# Altium PCB MainPCBV6.PcbDoc (part 2 of 5)
Units mm, origin at the board's own origin, x right, y up, seen from the top; angles counter-clockwise.
Board outline 176 x 144.01 mm, 2 copper layers (Top Layer, Bottom Layer); 232 components, 243 nets, 937 pads, 277 vias.
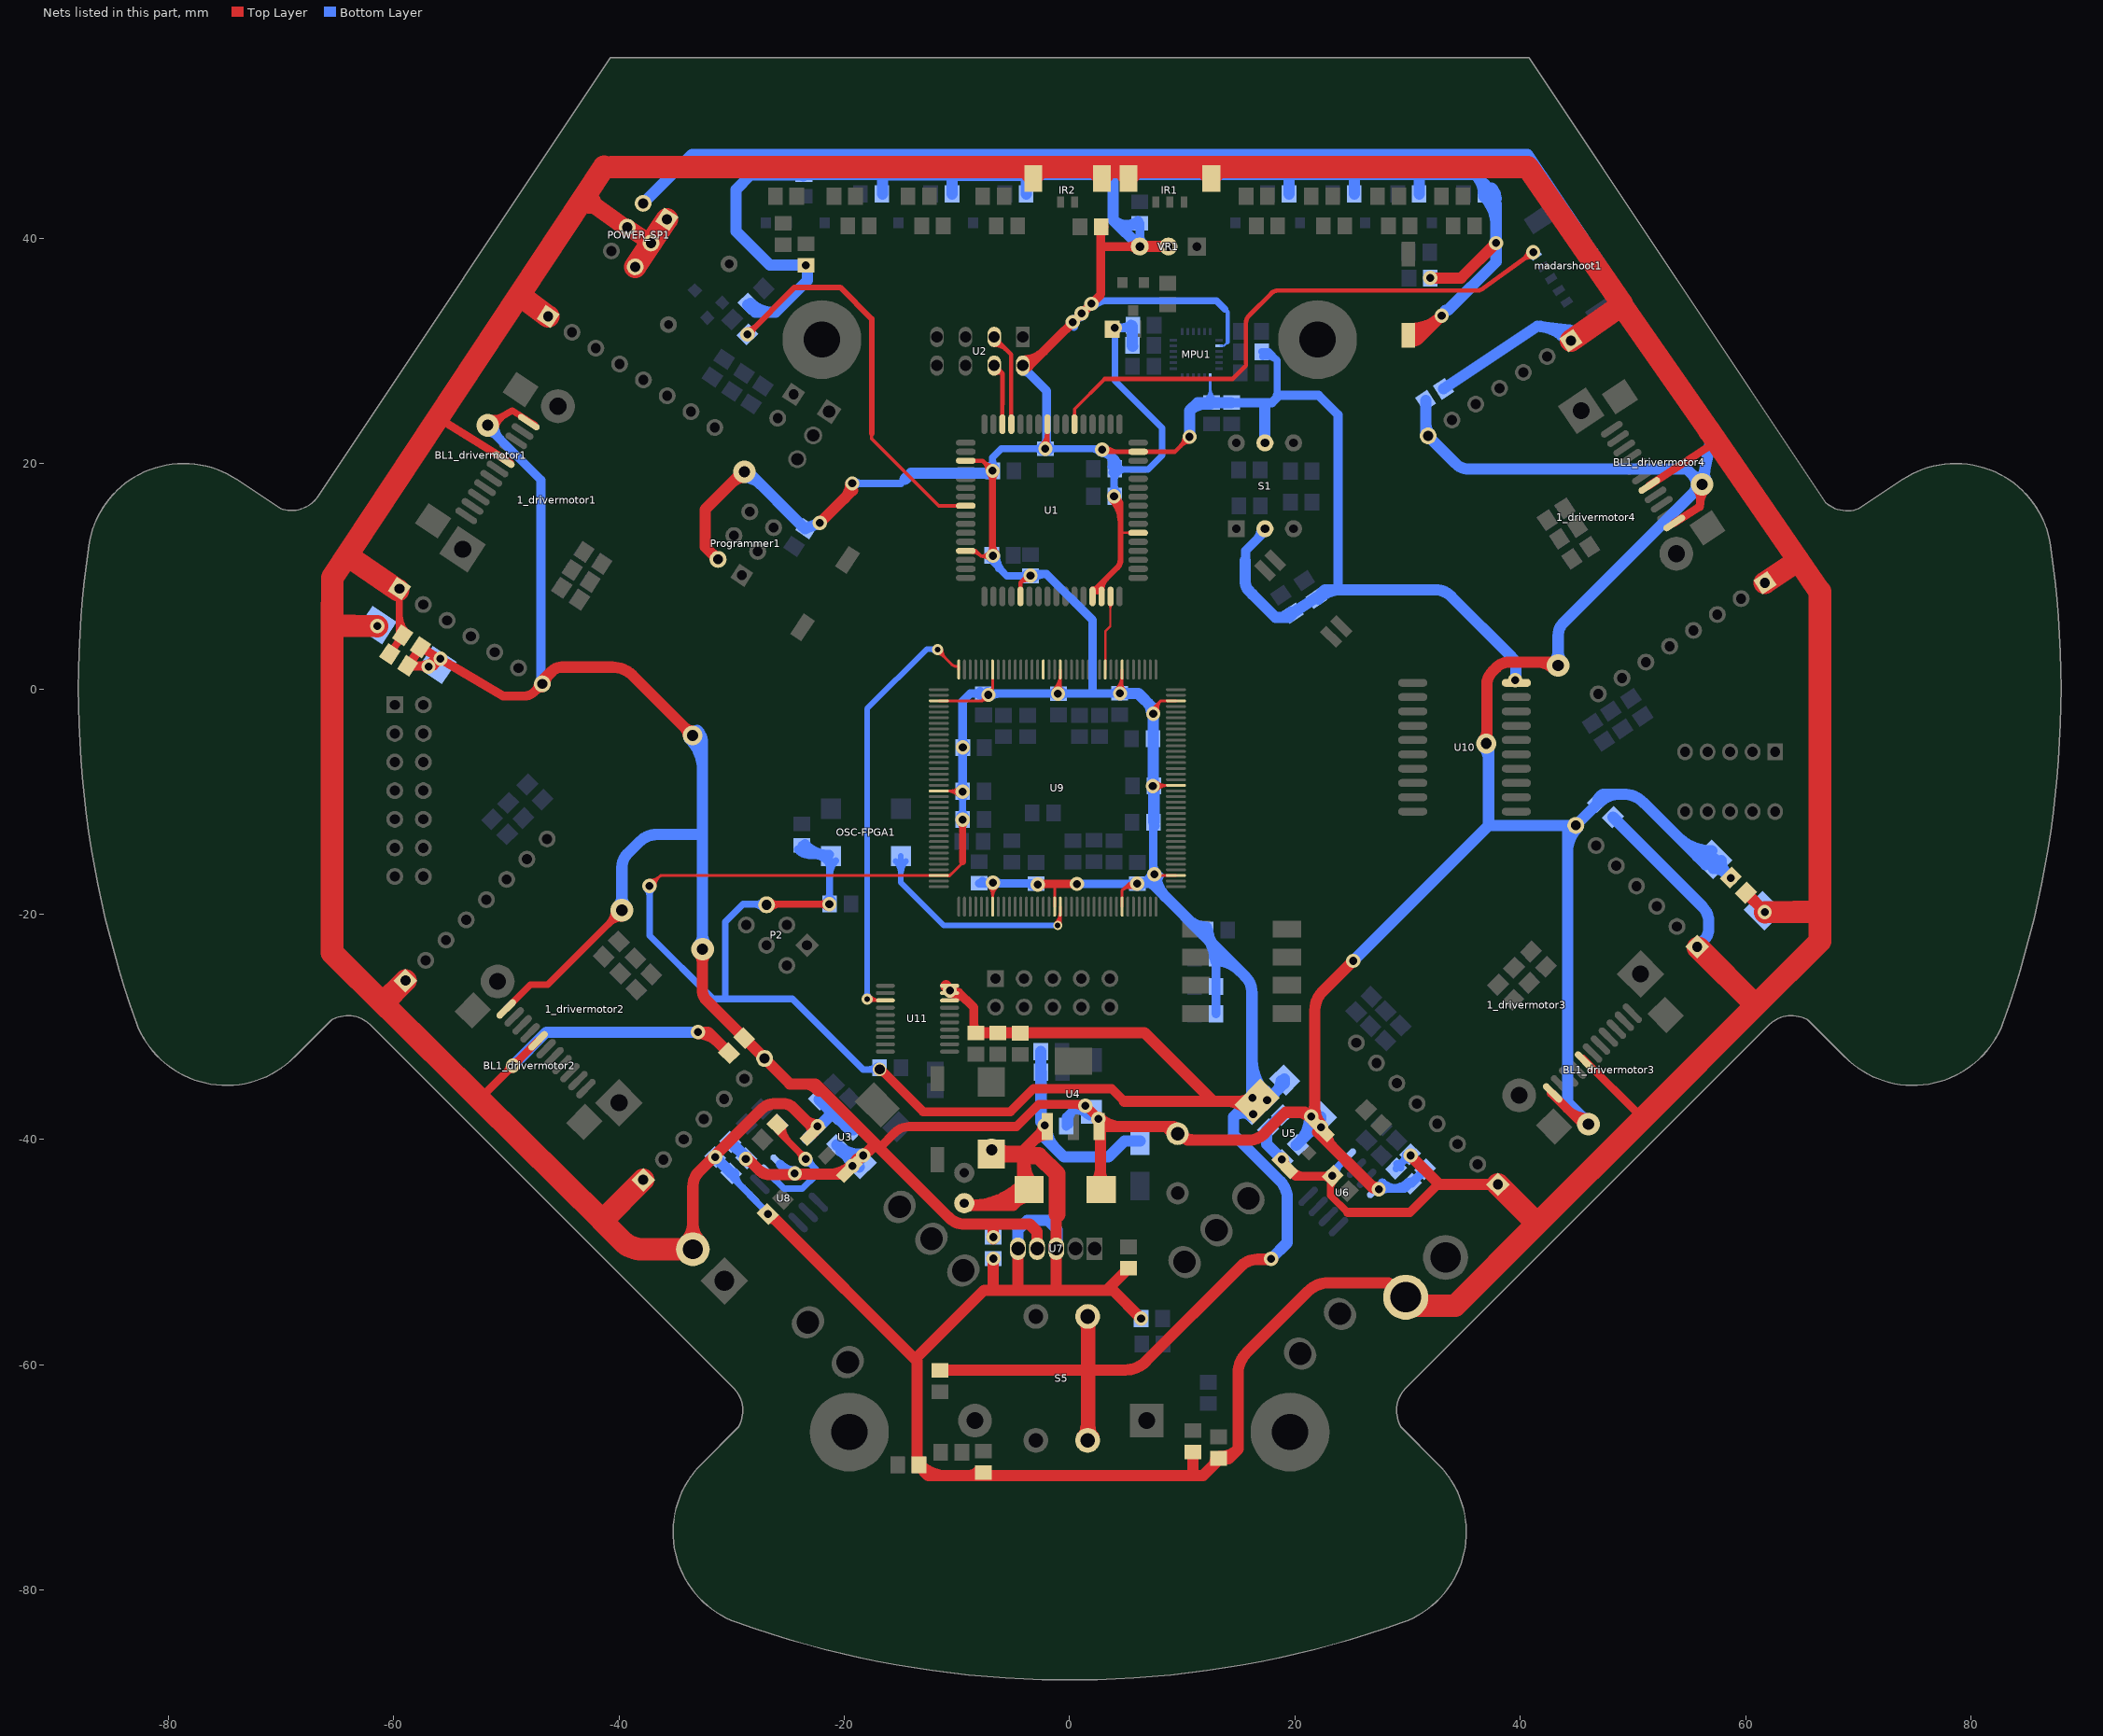
[diagram p2: the nets of this part, all layers, seen from the top]

## Via types
v1: diameter 1.27, hole 0.711, Top Layer to Bottom Layer, 228 vias
v2: diameter 1, hole 0.5, Top Layer to Bottom Layer, 16 vias
v3: diameter 2, hole 1, Top Layer to Bottom Layer, 11 vias
v4: diameter 0.8, hole 0.5, Top Layer to Bottom Layer, 5 vias
v5: diameter 1, hole 0.7, Top Layer to Bottom Layer, 5 vias
v6: diameter 1.2, hole 0.6, Top Layer to Bottom Layer, 3 vias
v7: diameter 1.778, hole 0.965, Top Layer to Bottom Layer, 2 vias
v8: diameter 1, hole 0.6, Top Layer to Bottom Layer, 2 vias
v9: diameter 0.9, hole 0.5, Top Layer to Bottom Layer, 1 vias
v10: diameter 0.7, hole 0.45, Top Layer to Bottom Layer, 1 vias
v11: diameter 1.2, hole 0.9, Top Layer to Bottom Layer, 1 vias
v12: diameter 0.8, hole 0.4, Top Layer to Bottom Layer, 1 vias
v13: diameter 1.1, hole 0.711, Top Layer to Bottom Layer, 1 vias

## Nets (pads, with @x,y where several pads share a name; then routed paths per layer and width w, separated by ;. In a path a pad name is that pad's centre, name@x,y a point inside that pad or via, vN(x,y) a via of type N, cw(c..) or ccw(c..) an arc to the next point about the centre after c; other vN are vias at no path point) (continued)
3.3V: C8.2 C9.2 C10.2 C11.2 C12.2 C13.2 C14.2 C23.2 C24.2 C34.2 C40.1 C43.2 C44.1 C50.2 C51.2 C52.2 C53.2 C54.2 C55.2 C56.2 C57.2 C58.2 C59.2 C60.2 C61.2 C67.2 C68.2 C69.2 D4.1 MPU1.8 MPU1.13 OSC-FPGA1.4 P2.5 Programmer1.2 R16.1 R17.1 R30.1 R31.1 R32.1 R34_LED1.2 R34_LED2.2 R34_LED3.2 R34_LED4.2 R34_LED5.2 R34_LED6.2 R34_LED7.2 R41.1 R42.1 R44.1 R45.2 R46.2 R47.2 R48.2 R49.2 R50.2 R51.2 R52.2 R53.2 R55.2 S1.2 S1.5 S2.2 S5.2 U1.6 U1.15 U1.25 U1.35 U1.45 U1.53 U1.61 U1.62 U2.2 U5.4 U9.3 U9.19 U9.34 U9.43 U9.54 U9.66 U9.75 U9.91 U9.106 U9.115 U9.126 U9.138 U10.20 U11.18 U11.19 U11.20 VR1.2 VR1.3 | length 936.4
  Top Layer w0.2: 4.512,13.767 4.594,13.85 U1.6@6.075,13.85 ; U1.6@5.351,13.726 ccw(c5.053,13.427) 5.053,13.85 ccw(c5.053,14.272) U1.6@5.351,13.973
  Top Layer w0.254: v1@-37.313,-17.247 ccw(c-37.313,-16.449) -36.749,-17.013 ; v1@-37.313,-16.993 ccw(c-37.313,-15.582) -36.315,-16.58 ; v1@-37.287,-17.551 -36.3,-16.564 U9.106@-11.617,-16.564 -10.62,-16.564 ; v1@-36.805,-17.501 cw(c-35.762,-17.501) -36.499,-16.763 ; U9.91@-11.617,-9.064 -9.59,-9.064 v1(-9.51,-9.144) ; U9.75@-11.617,-1.064 -7.769,-1.064 ; U9.91@-10.93,-9.064 cw(c-10.93,-10.564) v1@-9.869,-9.503 ; U9.106@-10.855,-16.565 ccw(c-10.738,-16.446) -10.62,-16.564 ; U9.106@-10.853,-16.566 ccw(c-10.853,-16.008) -10.459,-16.402 ; -10.543,-9.064 ccw(c-10.543,-8.111) v1@-9.869,-8.785 ; -10.317,-9.064 cw(c-10.317,-9.951) v1@-9.689,-9.324 ; -9.51,-15.357 -9.461,-15.405 -10.62,-16.564 ; v1@-7.691,-0.708 cw(c-8.009,-0.824) -7.769,-1.064 ; v1@-7.62,-0.381 -7.62,-0.914 -7.769,-1.064 ; v1@-7.419,-0.998 ccw(c-7.546,-1.287) -7.769,-1.064 ; v1(-7.214,-0.533) -7.29,-0.533 -7.366,-0.457 -7.417,-0.457 -7.442,-0.483 -7.584,-0.483 -7.475,-0.592 -6.842,0.041 ; v1@-7.166,-17.58 cw(c-7.949,-18.363) -6.842,-18.363 ; v1@-7.107,-0.037 ccw(c-7.046,0.245) -6.842,0.041 ; v1@-6.845,-0.184 cw(c-6.728,-0.073) -6.842,0.041 ; U9.115@-6.842,-19.339 v1@-6.842,-17.393 ; U9.115@-6.842,-18.532 cw(c-5.496,-18.532) v1@-6.448,-17.58 ; -6.842,-17.919 cw(c-6.109,-17.919) v1@-6.628,-17.401 ; U9.66@-6.842,1.711 -6.842,0.041 ; v1@-1.401,-0.062 ccw(c-2.758,1.295) U9.54@-0.838,1.295 ; U9.126@-1.342,-19.339 -1.342,-17.38 cw(c-1.27,-17.38) -1.314,-17.323 ; v1@-1.221,-0.242 ccw(c-2.145,0.682) -0.838,0.682 ; v1(-1.041,-0.422) -0.95,-0.422 -0.838,-0.533 -0.838,1.707 U9.54@-0.842,1.711 ; -0.838,0.314 ccw(c-0.306,0.314) v1@-0.682,-0.062 ; v1@4.111,-0.047 ccw(c2.792,1.272) U9.43@4.658,1.272 ; v1@4.291,-0.227 ccw(c3.405,0.659) 4.658,0.659 ; U9.138@4.658,-19.339 4.658,-17.882 4.674,-17.882 ; v1@4.658,-0.336 U9.43@4.658,1.711 ; 4.658,0.368 ccw(c5.244,0.368) v1@4.83,-0.047 ; 4.906,-17.649 cw(c5.465,-18.209) v1@5.866,-17.527 ; 5.138,-17.417 cw(c5.637,-17.916) 5.994,-17.308 5.984,-17.297 5.258,-17.297 ; v1@5.516,-17.479 ccw(c5.258,-17.572) 5.258,-17.297 ; v1@5.523,-17.118 cw(c5.258,-17.012) 5.258,-17.297 ; v1@5.737,-17.746 ccw(c5.293,-18.501) 4.674,-17.882 ; v1@7.391,-1.753 8.08,-1.064 ; v1@7.421,-8.564 U9.19@9.433,-8.564 ; v1@7.518,-16.564 U9.3@9.433,-16.564 ; v1@7.556,-8.816 cw(c8.164,-9.424) 8.164,-8.564 ; v1@7.652,-2.114 cw(c8.318,-1.843) 7.81,-1.334 ; v1@7.735,-8.995 cw(c8.777,-10.037) U9.19@8.777,-8.564 ; v1@7.735,-8.277 ccw(c8.428,-7.584) 8.428,-8.564 ; v1@7.887,-2.018 cw(c8.703,-1.686) 8.08,-1.064 ; U9.34@9.433,-1.064 8.08,-1.064 ; 4.674,-17.882 5.258,-17.297
  Top Layer w0.305: U1.45@-9.225,12.25 -9.206,12.268 -8.357,12.268 -7.874,11.786 ; U1.45@-8.625,12.127 cw(c-8.625,11.139) -7.926,11.838 ; v1@-7.182,12.115 cw(c-7.874,12.677) -7.874,11.786 ; v1@-7.157,11.478 ccw(c-7.874,10.795) -7.874,11.786 ; v1@-6.833,11.786 -7.874,11.786
  Top Layer w0.381: U1.35@-9.225,20.25 -7.738,20.25 v1(-6.843,19.355) ; v1@-7.287,19.355 ccw(c-8.36,19.355) -7.602,20.114 ccw(c-6.843,20.872) v1@-6.843,19.799 ; U1.53@-4.375,8.2 -4.375,9.443 ; v1@-3.61,9.633 ccw(c-3.834,8.902) -4.375,9.443 ; v1(-3.48,10.058) -3.48,10.084 -3.531,10.084 -3.632,10.185 -4.375,9.443 ; v1@-2.473,21.635 ccw(c-3.677,22.839) U1.25@-1.975,22.839 ; v1(-2.159,21.321) -1.975,21.505 U1.25@-1.975,23.5 ; -1.975,21.949 ccw(c-1.531,21.949) v1@-1.845,21.635 ; v1(2.87,21.234) 3.055,21.05 U1.15@6.075,21.05 9.34,21.05 v1@10.655,22.365 ; v1@3.185,20.92 cw(c3.497,20.607) 3.497,21.05 ; v1@3.185,21.549 ccw(c4.389,22.754) 4.389,21.05 ; 9.866,21.575 ccw(c9.064,22.377) v1@10.198,22.377 ; 9.927,21.637 cw(c10.643,20.921) v1@10.643,21.933
  Top Layer w0.508: U1.61@2.025,8.821 ccw(c2.025,9.467) 2.482,9.01 ; U1.61@2.027,8.82 ccw(c2.08,9.325) 2.438,8.966 ; 2.438,8.613 2.438,8.966 ; U1.62@2.846,8.8 cw(c4.233,8.8) 3.252,9.78 ; v1@3.668,16.825 cw(c1.63,14.787) 4.512,14.787 ; v1(3.937,17.094) 4.512,16.52 ; v1@3.972,16.715 cw(c4.034,16.042) 4.512,16.52 ; v1@4.027,17.184 cw(c2.856,16.014) 4.512,16.014 ; v1@4.316,17.059 ccw(c4.99,16.998) 4.512,16.52 ; 2.438,8.966 4.217,10.745 ccw(c3.507,11.455) 4.512,11.455 4.512,13.767 4.512,16.52
  Top Layer w0.6: P2.5@-26.822,-19.126 v1(-21.336,-19.126) ; P2.5@-26.589,-19.494 cw(c-25.703,-20.38) -25.703,-19.126 ; P2.5@-26.589,-18.857 ccw(c-25.94,-18.208) -25.94,-19.126 ; v1@-21.573,-19.363 ccw(c-22.145,-19.935) -22.145,-19.126 ccw(c-22.145,-18.317) v1@-21.573,-18.889
  Top Layer w0.635: v1@-9.734,-11.832 cw(c-10.276,-12.374) -9.51,-12.374 cw(c-8.743,-12.374) v1@-9.285,-11.832 ; -9.51,-15.357 v1@-9.51,-11.43 ; v1@-7.067,19.13 cw(c-7.609,18.588) -6.843,18.588 cw(c-6.076,18.588) v1@-6.618,19.13 ; v1@-7.032,12.036 ccw(c-7.488,12.492) -6.843,12.492 ; -6.843,12.663 ccw(c-5.955,12.663) v1@-6.583,12.036 ; v1(-6.843,19.355) -6.843,12.04 -7.071,11.811 v1(-6.807,11.811)
  Top Layer w0.75: v1@-2.987,-17.323 -1.314,-17.323 v1(0.635,-17.323) ; v1@-2.661,-17.557 cw(c-2.094,-18.124) -2.094,-17.323
  Top Layer w0.8: v11@-16.866,-33.982 cw(c-16.866,-34.71) -16.351,-34.195 ; v11@-16.815,-33.833 -16.713,-33.833 -13.005,-37.541 -5.258,-37.541 -3.218,-35.501 3.726,-35.501 4.835,-36.61 ; U11.19@-10.643,-27.032 cw(c-10.643,-29.132) -9.157,-27.647 ; v1@-10.456,-26.654 ccw(c-9.855,-26.191) U11.19@-9.855,-26.949 ; U11.19@-10.439,-26.949 U11.19@-9.855,-26.949 ; C68.2@-8.509,-30.556 -8.509,-28.296 U11.19@-9.855,-26.949 ; -8.509,-29.755 ccw(c-7.64,-29.755) C68.2@-8.254,-30.369 ; U2.2@-4.166,28.402 ccw(c-4.166,29.149) U2.2@-3.637,28.621 ; U2.2@-4.166,28.702 -3.556,28.702 2.769,35.027 2.769,40.742 R32.1@3.048,41.021 ; U2.2@-4.166,29.202 ccw(c-4.166,31.881) -2.271,29.987 ; 2.769,40.231 cw(c3.494,40.231) R32.1@2.981,40.744 ; 3.124,39.268 VR1.3@6.223,39.268 ; VR1.3@5.94,38.986 ccw(c5.257,38.303) 5.257,39.268 ccw(c5.257,40.234) VR1.3@5.94,39.551 ; VR1.3@6.236,39.281 VR1.3@6.248,39.268
  Top Layer w1: Programmer1.2@-31.676,11.926 -32.36,12.61 -32.36,15.926 v3@-29.21,19.075 ; -29.95,18.335 cw(c-28.88,17.265) v3@-28.88,18.779 ; v1(-22.174,14.732) v1@-19.279,17.628 ; -19.983,16.923 ccw(c-21.298,18.237) v1@-19.439,18.237 ; v1@-19.279,18.237 v1@-19.279,18.288 ; C34.2@-11.379,-60.473 4.946,-60.473 ccw(c4.946,-57.933) 6.743,-59.729 15.062,-51.41 15.214,-51.258 ; v1@-10.668,-26.721 U11.19@-10.439,-26.949 ; C68.2@-8.397,-30.546 C69.2@-6.589,-30.546 ; C69.2@-6.375,-30.531 6.646,-30.531 12.725,-36.61 ; 4.835,-36.61 12.725,-36.61 ; VR1.3@6.248,39.268 VR1.2@8.763,39.268 ; 13.844,-36.61 cw(c13.844,-39.387) U5.4@15.807,-37.423 ; U5.4@15.147,-36.61 ccw(c15.147,-35.213) U5.4@16.135,-36.201 ; 15.214,-51.257 cw(c16.688,-52.733) 16.688,-50.648 v1@18.034,-50.648 ; U5.4@16.62,-36.61 12.725,-36.61 ; S2.2@30.022,31.003 ccw(c30.128,32.858) 31.442,31.544 ; S2.2@30.079,32.001 ccw(c30.3,35.842) v1(33.02,33.122) 30.995,31.096 ; S2.2@30.099,31.096 30.995,31.096 ; S2.2@30.125,30.987 ccw(c30.489,31.602) 30.995,31.096 ; S2.2@30.144,30.83 cw(c30.786,30.189) 30.786,31.096 ; v1(32.014,36.474) 34.747,36.474 v1(37.846,39.573) ; U11.20@-10.988,-26.361 ccw(c-10.892,-26.361) -10.96,-26.429 cw(c-10.892,-26.361) U11.20@-10.988,-26.361
  Top Layer w1.27: S5.2@1.218,-66.442 ccw(c0.424,-65.648) S5.2@1.547,-65.648 ; S5.2@1.243,-55.795 cw(c0.45,-56.589) S5.2@1.572,-56.589 ; S5.2@1.293,-66.72 1.626,-66.387 S5.2@1.626,-55.977 ; S5.2@1.293,-55.72 S5.2@1.549,-55.977 ; S5.2@1.648,-56.716 cw(c2.771,-56.716) S5.2@1.977,-55.922 ; S5.2@1.674,-65.648 ccw(c2.796,-65.648) S5.2@2.003,-66.442
  Bottom Layer w0.2: MPU1.8@13.386,30.455 13.691,30.455 14.021,30.785
  Bottom Layer w0.254: C43.2@12.129,25.78 ccw(c11.301,26.608) 12.471,26.608 ; C43.2@12.471,25.4 MPU1.13@12.471,27.668 ; 12.471,26.125 ccw(c13.213,26.125) C43.2@12.689,25.6 ; 12.471,26.738 ccw(c13.826,26.738) C43.2@12.868,25.78 ; C40.1@14.212,25.575 C40.1@14.376,25.41
  Bottom Layer w0.4: 13.767,33.706 14.021,33.452 14.021,30.785
  Bottom Layer w0.5: R55.2@-16.891,-33.807 v11(-16.866,-33.782)
  Bottom Layer w0.508: C40.1@14.341,25.41 C40.1@14.376,25.41
  Bottom Layer w0.6: v1@-37.549,-17.737 cw(c-38.183,-18.371) -37.287,-18.371 ; -37.287,-18.248 cw(c-36.565,-18.248) v1@-37.076,-17.737 ; v1@-37.287,-17.551 -37.287,-21.92 -31.674,-27.534 -24.613,-27.534 -18.339,-33.807 R55.2@-16.891,-33.807 ; -30.582,-27.534 -30.582,-20.701 -29.007,-19.126 P2.5@-26.899,-19.126 ; -28.113,-19.126 cw(c-28.113,-20.38) P2.5@-27.226,-19.494 ; -27.875,-19.126 ccw(c-27.875,-18.208) P2.5@-27.226,-18.857 ; OSC-FPGA1.4@-21.609,-15.275 cw(c-22.305,-15.971) -21.321,-15.971 ; R53.2@-21.573,-18.889 ccw(c-22.181,-18.281) -21.321,-18.281 ; R53.2@-21.568,-18.753 ccw(c-22.166,-18.156) -21.321,-18.156 ccw(c-20.476,-18.156) R53.2@-21.073,-18.753 ; R53.2@-21.321,-19.101 OSC-FPGA1.4@-21.321,-14.851 ; R53.2@-21.321,-18.354 ccw(c-20.564,-18.354) R53.2@-21.099,-18.889 ; -21.321,-16.628 cw(c-19.408,-16.628) OSC-FPGA1.4@-20.761,-15.275 ; -17.909,-33.807 ccw(c-17.909,-32.697) R55.2@-17.123,-33.482 ; -17.651,-33.807 ccw(c-17.651,-32.996) R55.2@-17.078,-33.57 ; -17.533,-33.807 cw(c-17.533,-34.387) R55.2@-17.123,-33.977 ; -17.529,-33.807 cw(c-17.529,-34.445) R55.2@-17.078,-33.994 ; v1@2.167,33.952 cw(c3.352,32.766) 3.352,34.442 ; v1@2.21,34.442 13.03,34.442 13.767,33.706 ; v1@3.776,31.818 cw(c3.204,31.246) 4.013,31.246 cw(c4.822,31.246) v1@4.25,31.818 ; 4.013,27.356 8.204,23.165 8.204,20.726 6.96,19.482 C12.2@4.14,19.482 ; 4.013,27.584 v1(4.013,32.055) ; C12.2@4.245,19.185 cw(c4.962,18.469) 4.962,19.482 ; C12.2@4.245,19.68 ccw(c4.724,20.159) 4.724,19.482
  Bottom Layer w0.635: v1(-19.304,18.237) -14.986,18.237 -14.618,18.605 ; v1@-19.079,18.013 cw(c-18.537,17.471) -18.537,18.237 cw(c-18.537,19.004) v1@-19.079,18.462 ; C53.2@-9.745,-11.273 ccw(c-10.313,-10.705) -9.51,-10.705 ccw(c-8.707,-10.705) C53.2@-9.275,-11.273 ; C54.2@-9.745,-9.428 cw(c-10.313,-9.996) -9.51,-9.996 cw(c-8.707,-9.996) C54.2@-9.275,-9.428 ; C53.2@-9.734,-11.383 ccw(c-10.276,-10.841) -9.51,-10.841 ccw(c-8.743,-10.841) C53.2@-9.285,-11.383 ; C54.2@-9.734,-9.369 cw(c-10.276,-9.911) -9.51,-9.911 cw(c-8.743,-9.911) C54.2@-9.285,-9.369 ; C53.2@-9.51,-11.633 v1(-9.51,-9.144) ; C13.2@-7.081,11.538 -5.566,10.023 C9.2@-3.48,10.023 ; C10.2@-7.078,19.69 ccw(c-7.646,20.258) -6.843,20.258 ccw(c-6.04,20.258) C10.2@-6.608,19.69 ; C10.2@-7.067,19.355 v1(-6.843,19.355) -6.843,20.538 -6.06,21.321 v1(-2.159,21.321) 2.758,21.321 v1@2.921,21.158 ; C10.2@-7.067,19.579 ccw(c-7.609,20.121) -6.843,20.121 ccw(c-6.076,20.121) C10.2@-6.618,19.579 ; C13.2@-6.966,11.536 cw(c-7.68,10.299) -6.3,10.669 ; C13.2@-6.587,11.736 ccw(c-4.914,11.736) -6.097,10.553 ; C13.2@-6.49,11.811 ccw(c-4.403,11.811) -5.879,10.335 ; -4.332,10.023 ccw(c-4.332,10.911) C9.2@-3.704,10.283 ; C9.2@-4.16,10.023 cw(c-4.16,9.378) C9.2@-3.704,9.834 ; C9.2@-3.815,9.788 ccw(c-4.383,9.22) -4.383,10.023 ccw(c-4.383,10.826) C9.2@-3.815,10.258 ; C11.2@-2.494,21.086 ccw(c-3.062,20.518) -3.062,21.321 ccw(c-3.062,22.124) C11.2@-2.494,21.556 ; C11.2@-2.384,21.096 ccw(c-2.926,20.554) -2.926,21.321 ccw(c-2.926,22.087) C11.2@-2.384,21.545 ; C11.2@-1.934,21.096 cw(c-1.392,20.554) -1.392,21.321 cw(c-1.392,22.087) C11.2@-1.934,21.545 ; C11.2@-1.824,21.086 cw(c-1.256,20.518) -1.256,21.321 cw(c-1.256,22.124) C11.2@-1.824,21.556 ; 1.895,21.321 cw(c1.895,20.259) v1@2.646,21.01 ; v1@2.84,20.918 cw(c2.733,19.777) 3.725,20.35 ; v1@2.87,21.321 v1@3.165,21.321 ; v1@2.886,20.917 cw(c2.957,19.446) 3.998,20.488 ; C12.2@3.671,19.693 ccw(c1.869,20.025) v1@3.165,21.321 ; C8.2@3.712,17.319 ccw(c3.17,17.861) 3.937,17.861 ccw(c4.704,17.861) C8.2@4.162,17.319 ; C8.2@3.763,17.429 ccw(c3.343,17.85) 3.937,17.85 ; C12.2@3.763,19.197 cw(c3.343,18.777) 3.937,18.777 ; C12.2@3.763,19.868 ccw(c3.195,20.435) 3.998,20.435 ccw(c4.801,20.435) C12.2@4.233,19.868 ; v1(3.937,17.094) C12.2@3.937,19.472 ; 3.937,18.144 ccw(c4.948,18.144) C8.2@4.233,17.429 ; 3.937,18.483 cw(c4.948,18.483) C12.2@4.233,19.197 ; C12.2@3.998,19.533 3.998,20.488 ; 4.019,20.466 cw(c3.312,19.759) C12.2@4.295,19.578 ; R44.1@17.053,29.925 17.65,29.925 18.415,29.159 ; R44.1@17.138,29.503 cw(c17.478,28.222) 18.415,29.159 ; 18.415,26.06 18.415,29.159 ; v1@3.165,21.321 3.998,20.488
  Bottom Layer w0.75: C54.2@-9.704,-8.799 ccw(c-10.174,-8.329) -9.51,-8.329 ccw(c-8.846,-8.329) C54.2@-9.315,-8.799 ; -9.525,-1.118 -8.829,-0.422 v1(-1.041,-0.422) 2.032,-0.422 ; v1(-9.51,-9.144) -9.51,-1.143 ; -9.51,-6.032 cw(c-8.759,-6.032) C52.2@-9.29,-5.501 ; C52.2@-9.51,-5.896 cw(c-8.795,-5.896) C52.2@-9.301,-5.391 ; C52.2@-9.51,-4.518 ccw(c-8.795,-4.518) C52.2@-9.301,-5.023 ; -9.51,-4.382 ccw(c-8.759,-4.382) C52.2@-9.29,-4.913 ; C61.2@-8.111,-0.422 cw(c-8.111,-1.431) C61.2@-7.397,-0.717 ; C55.2@-8.026,-17.282 -6.782,-17.282 -6.792,-17.272 -6.909,-17.272 -6.858,-17.323 -6.807,-17.323 v1(-6.807,-17.221) ; C61.2@-7.94,-0.616 ccw(c-8.409,-1.086) -8.409,-0.422 ccw(c-8.409,0.242) C61.2@-7.94,-0.227 ; C55.2@-7.582,-17.282 ccw(c-7.582,-16.446) v1@-6.991,-17.037 ; C61.2@-7.503,-0.422 -7.442,-0.483 -7.417,-0.457 -7.366,-0.457 -7.29,-0.533 v1(-7.214,-0.533) ; C61.2@-7.351,-0.616 cw(c-6.881,-1.086) -6.881,-0.422 cw(c-6.881,0.242) C61.2@-7.351,-0.227 ; v1@-7.201,-17.282 cw(c-7.201,-16.532) C55.2@-7.732,-17.062 ; C61.2@-7.03,-0.717 cw(c-6.316,-1.431) -6.316,-0.422 ; v1@-6.731,-17.282 C59.2@-3.048,-17.282 ; v1@-6.623,-17.037 ccw(c-6.032,-16.446) -6.032,-17.282 ; -3.822,-17.282 cw(c-3.822,-18.033) C59.2@-3.292,-17.502 ; C59.2@-3.693,-17.282 cw(c-3.693,-18.222) C59.2@-3.029,-17.557 ; C9.2@-3.454,10.185 -2.057,10.185 2.032,6.096 2.032,-0.422 ; C9.2@-3.296,9.875 cw(c-2.546,9.124) -2.546,10.185 ; C9.2@-3.185,9.828 cw(c-2.323,8.966) -2.323,10.185 ; C60.2@-1.285,-0.616 ccw(c-1.755,-1.086) -1.755,-0.422 ccw(c-1.755,0.242) C60.2@-1.285,-0.227 ; C60.2@-0.696,-0.616 cw(c-0.227,-1.086) -0.227,-0.422 cw(c-0.227,0.242) C60.2@-0.696,-0.227 ; v1(0.635,-17.323) 5.979,-17.323 v1(5.994,-17.308) ; 3.594,-0.422 ccw(c3.594,0.329) C51.2@4.125,-0.202 ; C51.2@3.806,-0.422 ccw(c3.806,0.258) C51.2@4.287,-0.223 ; C51.2@4.343,-0.422 2.032,-0.422 ; 5.194,-17.323 ccw(c5.194,-16.607) C50.2@5.7,-17.113 ; C50.2@5.33,-17.323 ccw(c5.33,-16.643) C50.2@5.811,-17.124 ; C50.2@6.289,-17.502 cw(c6.758,-17.972) 6.758,-17.308 cw(c6.758,-16.644) C50.2@6.289,-17.113 ; 7.026,-17.308 ccw(c7.026,-16.3) v1@7.985,-16.61 ; v1@7.271,-16.379 cw(c5.994,-15.966) C50.2@5.994,-17.308 ; 7.351,-17.308 v1(5.994,-17.308) ; v1@7.402,-16.459 C58.2@7.402,-11.887 ; 7.402,-15.55 ccw(c8.428,-15.55) v1@7.702,-16.275 ; 7.402,-12.687 cw(c8.152,-12.687) C58.2@7.621,-12.156 ; C55.2@-7.732,-17.062 ccw(c-7.226,-16.556) -7.226,-17.272 cw(c-7.226,-16.556) C55.2@-7.732,-17.062
  Bottom Layer w0.762: v1@0.381,32.141 cw(c1.343,32.141) v1@1.124,33.077 ; v1@0.381,32.337 cw(c1.116,32.337) v1@1.079,33.071 ; v1@0.381,32.36 v1@0.381,32.614
  Bottom Layer w0.8: C44.1@-24.086,-14.269 ccw(c-23.113,-13.407) -23.113,-14.707 ; C44.1@-23.774,-13.904 -22.972,-14.707 -21.336,-14.707 cw(c-21.336,-11.833) C44.1@-23.487,-13.738 ; C44.1@-23.424,-13.904 ccw(c-22.579,-13.904) C44.1@-23.177,-14.501 ; -22.74,-14.707 cw(c-22.74,-16.406) OSC-FPGA1.4@-21.538,-15.204 ; U2.2@-4.166,28.202 cw(c-4.166,27.302) -3.529,27.938 ; U2.2@-4.166,28.702 -4.166,28.575 -2.057,26.467 C11.2@-2.057,21.361 ; C11.2@-2.325,21.487 ccw(c-2.972,22.133) -2.057,22.133 ; v1@0.279,32.798 ccw(c0.279,33.488) v1@0.767,33 ; v1@0.381,32.614 v1@2.21,34.442 ; v1(4.013,32.055) R42.1@5.563,32.055 ; 4.689,32.055 ccw(c4.689,33.097) R42.1@5.426,32.36 ; R42.1@5.563,32.334 R42.1@5.613,32.283 ; VR1.3@5.94,39.551 ccw(c5.257,40.234) 6.223,40.234 ccw(c7.189,40.234) VR1.3@6.506,39.551 ; VR1.3@6.223,39.268 R31.1@6.223,41.341 ; C43.2@12.471,25.4 14.351,25.4 17.958,25.4 18.618,26.06 ; R47.2@12.99,-28.854 R48.2@12.99,-26.441 R49.2@12.99,-23.901 12.99,-22.951 12.992,-22.949 ; 15.621,11.43 15.621,12.268 S1.2@17.331,13.979 ; 16.548,13.196 ccw(c15.532,14.212) S1.2@16.969,14.212 ; 18.415,26.06 22.098,26.06 23.825,24.333 23.825,8.839
  Bottom Layer w1: v3@-28.88,18.779 cw(c-28.88,16.836) -27.506,18.21 ; v3(-28.88,19.279) -29.032,19.279 -29.159,19.152 -28.448,19.152 R17.1@-23.673,14.376 ; R16.1@-28.586,34.101 -27.912,33.426 -26.111,33.426 -23.266,36.271 -23.266,37.617 -26.619,37.617 -29.616,40.615 -29.616,44.323 -28.311,45.629 R51.2@-23.597,45.629 ; R16.1@-28.333,34.238 ccw(c-26.374,36.197) -26.374,33.426 ; R51.2@-23.673,45.542 -23.571,45.644 -16.662,45.644 ; v1@-23.514,37.512 cw(c-24.113,36.913) -23.266,36.913 ; R17.1@-23.47,14.224 -23.408,14.248 v1(-22.174,14.732) ; R34_LED1.2@-16.627,43.942 -16.627,45.634 -10.196,45.634 -10.185,45.644 ; -14.618,18.605 -14.093,19.13 C10.2@-7.067,19.13 ; R34_LED2.2@-10.442,43.942 -10.442,45.591 -3.919,45.591 -3.866,45.644 ; -7.711,19.13 ccw(c-7.711,20.223) C10.2@-6.938,19.45 ; -7.506,19.13 ccw(c-7.506,19.918) C10.2@-6.949,19.361 ; R34_LED3.2@-3.866,43.942 -3.866,45.644 ; C51.2@4.343,-0.406 6.096,-0.406 7.402,-1.712 C57.2@7.402,-4.445 C56.2@7.402,-8.661 ; R42.1@5.544,32.191 5.544,30.447 R41.1@5.588,30.404 ; R31.1@6.035,41.462 cw(c5.046,42.816) 3.861,41.631 ; VR1.3@6.223,39.268 3.861,41.631 ; 6.845,-1.155 cw(c5.791,-2.21) v1@7.282,-2.21 ; 7.351,-17.308 12.992,-22.949 15.596,-25.552 cw(c14.185,-26.963) 16.18,-26.963 16.18,-36.347 14.529,-37.998 ; C58.2@7.478,-11.801 C56.2@7.478,-8.611 ; v1@7.653,-16.459 ccw(c10.432,-16.459) 8.467,-18.424 ; 10.551,-20.508 ccw(c12.131,-18.928) R50.2@12.131,-21.162 ; v1(10.643,22.377) 10.643,24.689 ; R50.2@12.129,-22.086 cw(c10.413,-23.801) R49.2@12.84,-23.801 ; R50.2@12.281,-21.512 ccw(c14.033,-21.512) 12.794,-22.751 ; C43.2@12.472,25.263 ccw(c12.106,23.225) 10.643,24.689 ; C43.2@12.573,25.41 11.364,25.41 10.643,24.689 ; C43.2@12.598,25.41 14.341,25.41 C40.1@14.351,25.4 ; R49.2@12.99,-24.151 cw(c12.99,-27.061) 15.047,-25.003 ; 12.99,-23.151 cw(c12.99,-23.646) R49.2@13.34,-23.296 ; 14.625,-37.902 cw(c17.444,-40.721) C23.2@17.444,-36.735 ; 14.86,-37.733 cw(c15.448,-38.552) C24.2@16.183,-37.862 ; 14.937,-37.729 ccw(c13.746,-35.589) v1@16.101,-36.26 ; 15.288,-37.239 cw(c16.05,-38.001) C24.2@16.756,-37.187 ; 15.57,11.379 15.57,9.601 ccw(c16.919,9.601) 15.965,8.647 16.218,8.395 18.288,6.325 19.431,6.325 R45.2@19.888,6.782 ; 15.787,-37.068 cw(c16.287,-37.765) 16.912,-37.178 ; C24.2@16.101,-37.942 ccw(c15.345,-38.815) 14.529,-37.998 ; v1@16.127,-36.211 ccw(c15.53,-35.718) 16.283,-35.54 ; 16.18,-35.102 ccw(c18.927,-35.102) 16.984,-37.044 ; 16.18,-32.688 ccw(c21.341,-32.688) C23.2@17.691,-36.337 ; C24.2@16.201,-37.878 ccw(c15.434,-38.904) 14.529,-37.998 ; v1@16.209,-36.43 cw(c16.061,-37.339) C23.2@16.809,-36.8 ; C24.2@16.27,-37.758 17.478,-36.551 17.526,-36.551 19.05,-35.027 D4.1@19.05,-34.646 ; v1@16.332,-36.195 cw(c17.444,-37.307) C23.2@17.444,-35.735 ; v1@16.335,-36.212 ccw(c17.42,-35.332) C23.2@17.58,-36.719 ; 16.836,-36.897 ccw(c16.592,-35.986) C23.2@17.409,-36.458 ; 17.282,-35.628 cw(c16.298,-36.196) C23.2@17.396,-36.49 ; 17.323,25.222 17.331,25.214 S1.5@17.331,21.832 ; S1.2@17.331,13.979 S1.2@17.331,14.212 ; v1(17.882,-50.597) 19.304,-49.174 19.304,-45.212 ccw(c17.158,-45.212) 18.676,-43.695 ; 18.407,-35.669 ccw(c17.547,-34.809) D4.1@18.763,-34.809 ; 18.52,6.325 ccw(c18.52,7.874) R45.2@19.616,6.779 ; 18.675,-43.694 14.529,-39.548 14.529,-37.998 ; R34_LED7.2@19.467,43.942 19.467,45.644 ; R45.2@19.806,6.728 21.858,8.07 R46.2@21.869,8.077 ; R46.2@21.888,8.023 22.653,8.788 32.487,8.788 cw(c32.487,6.887) 33.831,8.232 39.247,2.816 cw(c38.336,1.905) 39.624,1.905 v1@39.624,0.711 ; R46.2@22.078,7.973 cw(c24.047,6.004) 24.047,8.788 ; R34_LED6.2@25.258,43.942 25.258,45.527 25.273,45.542 ; R34_LED5.2@31.024,43.942 31.024,45.502 31.039,45.517 ; v1@33.35,33.604 33.553,33.604 37.846,37.897 v1(37.846,39.573) 37.846,43.028 R34_LED4.2@36.83,44.044 ; 36.095,45.541 cw(c34.596,44.042) R34_LED4.2@36.716,44.042 ; R34_LED4.2@36.76,43.736 cw(c34.137,41.113) 37.846,41.113 ; R34_LED4.2@36.848,43.693 cw(c36.712,42.568) 37.846,42.568 ; R34_LED4.2@36.866,43.692 cw(c36.866,42.929) R34_LED4.2@37.405,43.469 ; R34_LED4.2@36.866,43.942 36.866,44.77 35.992,45.644 19.467,45.644 ; R34_LED4.2@37.467,44.443 cw(c36.551,43.527) 37.846,43.527 ; -3.866,45.644 3.861,45.644 ; 3.861,41.631 3.861,45.644 ; 3.861,45.644 19.467,45.644
  other v1: 16.281,-37.77 17.526,-36.525 16.231,-36.297 -10.643,-26.797 -37.313,-17.501 -2.845,-17.374 7.518,-16.459 -9.51,-11.608 7.376,-8.636 -9.484,-5.207 7.417,-2.21 4.47,-0.406 39.548,0.762 0.279,32.563 1.067,33.325 1.93,34.188 -23.419,37.607
5V: 1_drivermotor1.9 1_drivermotor2.9 1_drivermotor3.9 1_drivermotor4.9 BL1_drivermotor1.11 BL1_drivermotor2.11 BL1_drivermotor3.11 BL1_drivermotor4.11 C15_drivermotor1.2 C15_drivermotor2.2 C15_drivermotor3.2 C15_drivermotor4.2 C16.2 C19.2 C22.2 C25.1 C26.2 C30.1 C31.2 C32.2 C33.1 C36.2 C37.1 C38.2 C39.1 D1.2 D3.2 D4.2 L1.2 POWER_SP1.2 U3.3 U4.3 U5.3 U6.8 U7.4 U8.8 | length 635
  Top Layer w0.6: v3@-51.714,23.419 -51.687,23.434 -49.462,24.701 -47.979,23.744 BL1_drivermotor1.11@-47.487,23.426 ; v3@-51.478,24.068 ccw(c-51.074,25.543) -50.317,24.214 ; v3@-50.989,23.208 cw(c-49.203,22.718) -50.119,24.327 ; BL1_drivermotor2.11@-50.02,-28.42 -47.864,-26.264 -46.33,-26.264 -40.107,-20.041 v3@-40.107,-19.609 ; -40.964,-20.898 ccw(c-42.202,-19.66) v3@-40.451,-19.66 ; -40.903,-20.837 cw(c-39.751,-21.988) v3@-39.751,-20.36
  Top Layer w0.7: BL1_drivermotor4.11@53.669,14.725 55.931,16.18
  Top Layer w0.75: v3@55.649,17.766 cw(c54.479,16.814) 55.98,16.66 cw(c57.481,16.506) v3@56.529,17.676 ; 55.931,16.18 v3(56.134,18.161)
  Top Layer w0.8: C38.2@-58.773,2.038 -56.458,2.038 -55.931,2.565 cw(c-56.789,3.423) v1@-56.9,2.215 ; C38.2@-58.768,2.366 ccw(c-58.926,3.124) -58.278,2.7 ; C38.2@-58.699,2.057 C15_drivermotor1.2@-57.63,3.689 -55.877,2.657 -54.214,1.676 -54.003,1.552 -50.292,-0.635 -48.387,-0.635 ccw(c-48.387,0.542) -47.555,-0.291 1_drivermotor1.9@-46.824,0.44 ; C38.2@-58.54,2.298 ccw(c-57.913,2.926) -57.913,2.038 ; -57.939,2.038 ccw(c-57.939,4.752) v1@-56.021,2.833 ; -57.627,2.038 cw(c-57.627,1.276) v1@-57.088,1.815 ; C15_drivermotor1.2@-57.332,3.835 ccw(c-56.418,4.071) -56.897,3.258 ; v1@-56.425,2.28 ccw(c-56.794,2.919) v1@-56.082,2.728 ; -47.555,-0.29 -47.356,-0.091 ; 1_drivermotor1.9@-47.173,0.41 cw(c-47.802,0.355) -47.356,-0.091 ; 1_drivermotor1.9@-46.855,0.091 ccw(c-46.909,-0.538) -47.356,-0.091 ; -16.84,-40.716 -15.525,-39.401 cw(c-14.224,-40.702) -14.224,-38.862 -4.724,-38.862 -2.769,-36.906 1.295,-36.906 v1(1.397,-37.008) U4.3@2.553,-38.163 ; 0.584,-36.906 cw(c0.584,-37.82) v1@1.231,-37.174 ; BL1_drivermotor3.11@42.746,-35.888 45.364,-38.506 v3@46.253,-38.506 ; 44.115,-37.257 ccw(c46.05,-35.323) v3@46.05,-38.059 ; -47.422,-0.158 cw(c-46.824,-0.755) -46.824,0.09 ccw(c-46.824,-0.755) -47.422,-0.158 ; -47.422,-0.158 ccw(c-48.019,0.44) -47.174,0.44 cw(c-48.019,0.44) -47.422,-0.158
  Top Layer w1: 1_drivermotor1.9@-46.939,0.533 -46.939,0.584 -45.949,1.575 cw(c-45.09,0.716) -45.09,1.93 -40.6,1.93 cw(c-40.6,-0.61) -38.804,1.186 v7@-33.706,-3.912 ; 1_drivermotor1.9@-46.574,0.44 cw(c-45.345,0.44) -46.214,1.309 ; v7@-33.866,-4.14 ccw(c-34.805,-4.14) -34.141,-3.476 ccw(c-33.477,-2.812) v7@-33.477,-3.751 ; v3@-32.942,-23.468 cw(c-33.734,-24.26) -32.614,-24.26 ; -32.614,-24.382 cw(c-31.32,-24.382) v3@-32.235,-23.468 ; v3@-32.614,-23.114 -32.614,-26.721 ccw(c-31.259,-26.721) -32.217,-27.679 ; -32.083,-27.813 -32.217,-27.679 ; v1@-28.753,-41.867 cw(c-28.753,-42.622) -28.219,-42.088 ; v1@-28.689,-41.618 -27.581,-42.726 ; -27.813,-42.494 -27.582,-42.725 ; 1_drivermotor2.9@-27.203,-32.715 -24.841,-35.077 -23.546,-35.077 ; 1_drivermotor2.9@-27.082,-32.814 -32.217,-27.679 ; v1@-23.952,-43.129 -26.607,-43.129 cw(c-26.607,-41.75) -27.581,-42.726 ; v1@-23.952,-43.104 -20.015,-43.104 -18.491,-41.58 v1@-18.435,-41.58 ; -22.301,-35.712 -22.505,-35.508 ccw(c-23.546,-36.549) -23.546,-35.077 ; -21.383,-43.104 ccw(c-21.383,-40.263) U3.3@-19.374,-42.272 ; U3.3@-19.055,-42.18 cw(c-18.435,-42.201) v1@-18.435,-41.58 ; -17.476,-40.638 v1@-18.435,-41.58 ; v1@-6.807,-48.856 -6.807,-47.523 ; U7.4@-2.894,-49.708 -2.894,-48.186 -3.556,-47.523 -6.807,-47.523 ; C33.1@2.199,-43.955 ccw(c0.945,-42.702) 2.718,-42.702 ; U4.3@2.445,-38.272 cw(c1.785,-38.931) U4.3@2.718,-38.931 ; U4.3@2.449,-38.276 cw(c1.884,-38.889) U4.3@2.718,-38.889 ; U4.3@2.635,-38.081 ccw(c4.532,-36.184) 4.532,-38.866 ; C33.1@2.718,-44.501 2.718,-38.866 9.25,-38.866 10.439,-40.056 15.941,-40.056 ccw(c15.941,-38.191) 17.259,-39.51 19.17,-37.599 20.86,-37.599 ; 2.718,-42.818 ccw(c4.325,-42.818) C33.1@3.189,-43.955 ; L1.2@8.768,-39.121 ccw(c9.576,-38.314) L1.2@9.576,-39.456 ; L1.2@9.254,-38.953 cw(c8.354,-39.853) L1.2@9.627,-39.853 ; L1.2@9.929,-39.602 ccw(c11.024,-38.507) 11.024,-40.056 ; 20.208,-37.599 cw(c20.208,-39.202) v1@21.342,-38.068 ; v1@21.247,-37.91 U5.3@22.301,-38.964 ; v1@21.342,-37.878 ccw(c20.315,-36.85) 21.768,-36.85 ; v1@21.377,-37.852 ccw(c21.069,-37.234) 21.753,-37.135 ; v1@21.404,-38.104 cw(c20.974,-39.793) U5.3@22.473,-38.903 ; v1@21.573,-37.973 ccw(c22.389,-37.973) U5.3@21.812,-38.55 ; 21.768,-37.238 ccw(c24.002,-37.238) U5.3@22.422,-38.817 ; U5.3@22.018,-39.366 26.975,-44.323 v1@27.381,-44.323 ; U5.3@22.348,-39.163 U5.3@22.348,-39.085 ; U5.3@22.454,-38.964 U5.3@22.301,-38.964 ; U5.3@22.462,-38.913 ccw(c24.627,-38.913) 23.096,-40.444 ; U5.3@22.555,-39.218 U5.3@22.301,-38.964 ; U5.3@22.843,-39.58 ccw(c24.318,-39.58) 23.275,-40.623 ; v1(25.171,-24.155) 22.682,-26.645 22.432,-26.894 ccw(c24.037,-28.499) 21.768,-28.499 21.768,-38.506 22.225,-38.964 U5.3@22.301,-38.964 ; 26.594,-43.943 ccw(c27.432,-43.105) v1@27.432,-44.29 ; v7@36.707,-4.576 ccw(c35.921,-3.79) 37.033,-3.79 ; v7@37.033,-4.978 37.033,0.381 cw(c38.628,0.381) 37.499,1.508 ; 37.5,1.508 37.884,1.892 cw(c39.019,0.758) 39.019,2.362 43.332,2.362 43.358,2.337 v3(43.358,2.083) ; 41.476,2.362 cw(c41.476,0.201) v3@43.004,1.729 ; -23.546,-35.077 -22.581,-35.077 -10.706,-46.952 ccw(c-9.326,-45.572) -9.326,-47.523 -6.807,-47.523
  Bottom Layer w0.8: v3@-51.689,23.292 -46.939,18.542 -46.939,0.555 1_drivermotor1.9@-46.824,0.44 ; v3@-51.664,22.793 cw(c-51.664,21.651) -50.856,22.459 ; v3@-51.064,23.393 ccw(c-49.308,23.393) -50.55,22.152 ; -46.939,1.562 ccw(c-45.702,1.562) 1_drivermotor1.9@-46.577,0.687 ; U8.8@-25.709,-42.194 -24.799,-43.104 v1@-24.435,-43.104 ; U8.8@-25.605,-42.297 ccw(c-24.409,-41.102) v1@-24.409,-42.793 ; U8.8@-25.214,-42.83 ccw(c-24.553,-42.169) v1@-24.553,-43.104 ; C19.2@-0.303,-38.83 -0.303,-38.022 0.33,-37.389 ; C19.2@-0.058,-38.68 cw(c1.336,-38.395) 0.33,-37.389 ; 0.563,-37.389 cw(c0.563,-38.798) D3.2@1.559,-37.801 ; 0.763,-37.389 ccw(c0.763,-36.263) D3.2@1.559,-37.059 ; D3.2@1.193,-36.89 cw(c0.33,-36.392) 0.33,-37.389 ; D3.2@1.397,-37.389 0.33,-37.389 ; D3.2@1.595,-37.134 ccw(c2.089,-37.449) D3.2@1.768,-37.938 ; U6.8@27.255,-44.354 29.712,-44.354 C25.1@30.277,-43.79 ; v1@27.598,-44.591 cw(c28.169,-45.162) 28.169,-44.354 ; U6.8@27.75,-43.859 ccw(c28.945,-42.664) 28.945,-44.354 ; 28.781,-44.354 ccw(c28.781,-42.536) C25.1@30.066,-43.822 ; C25.1@30.364,-43.877 31.558,-42.683 C26.2@31.558,-42.658
  Bottom Layer w1: v3@-40.105,-19.306 ccw(c-40.958,-18.452) -39.751,-18.452 ccw(c-38.544,-18.452) v3@-39.397,-19.306 ; v3(-39.751,-19.66) -39.751,-15.85 cw(c-38.034,-15.85) -39.249,-14.636 -38.189,-13.576 cw(c-36.625,-15.14) -38.188,-13.575 cw(c-36.625,-15.14) -36.625,-12.929 -32.639,-12.929 ; POWER_SP1.2@-37.874,43.101 -33.528,47.447 40.64,47.447 56.589,23.654 cw(c55.784,22.848) 56.835,23.288 cw(c55.784,22.848) 56.923,22.848 56.923,22.158 v3@56.153,18.256 ; v7@-33.752,-4.415 cw(c-36.563,-7.226) -32.588,-7.226 ; v7@-33.706,-3.861 -32.588,-4.978 v3(-32.588,-23.114) ; v7@-33.045,-3.708 cw(c-34.148,-4.811) -32.588,-4.811 ; v3@-32.942,-22.76 ccw(c-33.795,-21.907) -32.588,-21.907 ccw(c-31.381,-21.907) v3@-32.235,-22.76 ; C32.2@-30.113,-40.222 -28.702,-41.633 C30.1@-28.702,-41.681 ; C16.2@-20.662,-40.499 C16.2@-20.639,-40.499 ; C16.2@-20.312,-41.053 cw(c-21.059,-42.527) D1.2@-19.413,-42.379 ; -19.868,-41.27 cw(c-20.966,-42.367) D1.2@-19.414,-42.367 ; -19.851,-41.287 ccw(c-18.606,-40.042) D1.2@-18.606,-41.803 ; D1.2@-18.694,-42.443 C16.2@-20.639,-40.499 ; D1.2@-18.354,-41.293 cw(c-18.676,-38.536) C16.2@-20.639,-40.499 ; C22.2@20.104,-40.526 D4.2@22.225,-38.405 ; C22.2@20.345,-40.285 ccw(c18.033,-37.973) D4.2@21.303,-37.973 ; 21.055,-39.574 cw(c22.327,-40.845) D4.2@22.327,-39.048 ; 21.518,-39.158 cw(c21.952,-39.463) D4.2@22.251,-39.024 ; 21.626,-39.004 ccw(c20.685,-38.062) D4.2@22.016,-38.062 ; D4.2@22.052,-38.578 ccw(c21.447,-37.973) D4.2@22.303,-37.973 ; v1(25.171,-24.155) 37.186,-12.141 ; 1_drivermotor4.9@31.595,22.558 C15_drivermotor4.2@31.595,25.584 ; 31.595,23.578 ccw(c32.937,23.578) 1_drivermotor4.9@31.988,22.629 ; 1_drivermotor4.9@31.811,22.452 34.259,20.004 ccw(c35.458,21.203) 35.458,19.507 54.788,19.507 v3@56.096,18.199 ; v7@36.707,-5.126 cw(c35.553,-6.281) 37.186,-6.281 ; v7@37.186,-5.055 37.186,-12.141 ; v3@43.004,2.436 ccw(c42.151,3.29) 43.358,3.29 ccw(c44.565,3.29) v3@43.711,2.436 ; v3(43.358,2.083) 43.358,4.738 cw(c44.919,4.738) 43.814,5.841 ; 43.815,5.842 v3(56.134,18.161) ; 44.196,-14.496 cw(c47.305,-14.496) 1_drivermotor3.9@45.106,-12.298 ; 1_drivermotor3.9@44.78,-12.141 1_drivermotor3.9@44.933,-11.989 ; 1_drivermotor3.9@44.93,-12.121 46.965,-10.086 C15_drivermotor3.2@46.965,-10.033 ; 45.143,-37.675 cw(c44.159,-38.659) v3@45.55,-38.659 ; 45.327,-37.859 ccw(c46.05,-37.136) v3@46.05,-38.159 ; v3@45.669,-38.659 45.669,-38.202 44.221,-36.754 44.221,-23.343 44.196,-23.317 44.196,-12.141 37.186,-12.141 ; C15_drivermotor3.2@46.877,-10.047 cw(c47.577,-10.047) 47.577,-9.347 49.138,-9.347 cw(c49.138,-11.887) 50.934,-10.091 C37.1@56.439,-15.596 ; C15_drivermotor3.2@47.054,-10.082 cw(c48.829,-11.857) 48.829,-9.347 ; 53.984,-13.141 ccw(c56.99,-10.135) C37.1@56.99,-14.386 ; C37.1@55.691,-14.848 ccw(c56.99,-13.549) C37.1@56.99,-15.386 ; v3@55.856,18.576 ccw(c55.183,19.579) 56.368,19.345 ccw(c57.552,19.112) v3@56.549,18.439 ; v3@56.134,17.661 ccw(c56.134,16.454) 55.28,17.307 ccw(c54.427,18.161) 55.634,18.161 ccw(c54.427,18.161) 55.28,19.015 ccw(c56.134,19.868) v3@56.134,18.661 ; v3@56.172,18.275 v3@56.153,18.256 ; C37.1@57.061,-15.138 C37.1@57.277,-15.138 ; C37.1@57.099,-15.265 57.15,-15.265 v1(58.699,-16.815) ; C37.1@57.132,-15.928 cw(c57.132,-17.571) v1@58.293,-16.409 ; C37.1@57.832,-15.228 ccw(c59.568,-15.228) v1@58.34,-16.456 ; 58.181,-16.344 cw(c57.764,-17.065) v1@58.569,-16.85 ; 58.264,-16.323 ccw(c58.935,-15.936) v1@58.734,-16.684 ; v3@56.096,18.199 v3@56.153,18.256 ; v3@56.096,18.199 v3(56.134,18.161) ; v3(56.134,18.161) v3@56.153,18.256
  other v1: -6.782,-48.682 27.432,-44.425 -24.409,-43.028 -19.279,-42.367 -28.753,-41.732 -18.339,-41.427 22.327,-38.913 2.54,-38.176 21.438,-37.973 -56.921,1.981 -55.855,2.667
  other v3: 46.05,-38.659 -51.664,23.393
  other v7: 36.982,-4.851 -33.477,-4.14
AGND: 1_drivermotor1.8 1_drivermotor1.15 1_drivermotor2.8 1_drivermotor2.15 1_drivermotor3.8 1_drivermotor3.15 1_drivermotor4.8 1_drivermotor4.15 Battery1.2 BL1_drivermotor1.7 BL1_drivermotor2.7 BL1_drivermotor3.7 BL1_drivermotor4.7 C15_drivermotor1.1 C15_drivermotor2.1 C15_drivermotor3.1 C15_drivermotor4.1 C16.1 C17.1 C18.1 C19.1 C20.1 C21.1 C22.1 C23.1 C24.1 C25.2 C26.1 C27.2 C28.1 C29.2 C30.2 C31.1 C32.1 C33.2 C35.2 C36.1 C37.2 C38.1 C39.2 D2.2 D5.2 D6.1 D7.2 FB1.2 IR1.0 IR2.0 kick1.2 POWER_SP1.1 POWER_SP1.3 POWER_SP1.4 POWER_SP1.5 R37.1 R40.1 U3.1 U4.1 U5.1 U6.5 U7.3 U7.5 U8.5 | length 790
  Top Layer w0.635: C38.1@-60.354,3.503 ccw(c-60.478,4.23) -59.876,3.804 ; C38.1@-60.331,3.162 C15_drivermotor1.1@-59.21,4.743 -59.505,5.038 1_drivermotor1.15@-59.505,8.894 ; C38.1@-59.97,3.231 cw(c-59.115,3.377) -59.823,3.879 ; 1_drivermotor1.15@-59.811,8.588 cw(c-60.549,7.849) -59.505,7.849 cw(c-58.461,7.849) 1_drivermotor1.15@-59.199,8.588 ; -59.736,4.001 cw(c-59.073,3.532) C15_drivermotor1.1@-59.21,4.332 ; -59.728,4.012 ccw(c-60.375,4.471) C15_drivermotor1.1@-59.594,4.604 ; -59.505,6.474 ccw(c-57.508,6.474) C15_drivermotor1.1@-58.92,5.062 ; 23.139,-44.472 cw(c24.442,-44.472) C27.2@23.521,-43.551 ; 23.139,-44.365 cw(c24.426,-44.365) C27.2@23.516,-43.455 ; C27.2@23.357,-43.245 23.139,-43.462 23.139,-44.958 24.663,-46.482
  Top Layer w0.7: -55.27,23.546 -50.205,20.407 BL1_drivermotor1.7@-49.706,20.098 ; -52.426,-36.5 -52.426,-36.449 v1(-49.428,-33.452) ; v1@-49.713,-33.452 cw(c-50.401,-33.452) -49.915,-33.938 cw(c-49.428,-34.425) v1@-49.428,-33.737 ; v1@-49.428,-33.167 ccw(c-49.428,-32.398) -48.885,-32.942 ; v1@-49.412,-33.468 BL1_drivermotor2.7@-47.192,-31.248 ; BL1_drivermotor3.7@45.574,-32.841 50.868,-38.134 ; BL1_drivermotor4.7@51.45,18.053 57.421,21.967
  Top Layer w0.8: C38.1@-60.331,3.162 C38.1@-60.325,3.15 ; U5.1@19.082,-41.783 ccw(c20.389,-41.783) U5.1@19.465,-42.707 ; U5.1@19.095,-42.338 20.039,-43.282 C27.2@23.266,-43.282 ; U5.1@19.661,-42.762 ccw(c20.915,-41.508) 20.915,-43.282 ; C27.2@22.6,-43.282 cw(c22.6,-44.001) C27.2@23.109,-43.492 ; C27.2@22.602,-43.282 ccw(c22.602,-42.541) C27.2@23.126,-43.065 ; 24.663,-46.482 30.201,-46.482 32.741,-43.942
  Top Layer w1: kick1.2@-34.162,-49.048 ccw(c-35.869,-47.341) -33.455,-47.341 ccw(c-31.041,-47.341) kick1.2@-32.748,-49.048 ; kick1.2@-33.455,-49.756 -33.455,-44.196 cw(c-31.561,-44.196) -32.901,-42.858 -27.412,-37.369 cw(c-26.111,-38.67) -26.111,-36.83 -25.451,-36.83 cw(c-25.451,-38.118) -24.541,-37.207 U3.1@-22.682,-39.065 ; v1@-32.995,-30.615 cw(c-32.995,-33.094) -31.242,-31.341 ; v1(-32.995,-30.48) -32.103,-30.48 C15_drivermotor2.1@-30.237,-32.346 ; C35.2@-26.738,-46.841 cw(c-26.738,-47.626) -26.183,-47.071 ; C35.2@-26.429,-47.028 -26.226,-47.028 -13.564,-59.69 -13.564,-68.326 D5.2@-13.411,-68.478 ; -23.518,-38.229 ccw(c-22.377,-37.088) U3.1@-22.377,-38.702 ; -23.141,-38.606 cw(c-23.958,-39.423) U3.1@-22.803,-39.423 ; -13.564,-67.994 ccw(c-12.56,-67.994) D5.2@-13.27,-68.704 ; -13.564,-59.36 -7.595,-53.391 -6.579,-53.391 ; D5.2@-13.411,-68.986 -12.548,-69.85 D7.2@-7.671,-69.85 ; D5.2@-13.27,-68.904 ccw(c-10.986,-66.621) -10.986,-69.85 ; C29.2@-9.296,-45.847 -5.003,-45.847 C33.2@-3.606,-44.45 ; C29.2@-9.076,-45.533 ccw(c-8.318,-44.776) -8.318,-45.847 ; -9.011,-69.85 ccw(c-9.011,-68.569) D7.2@-8.105,-69.475 ; C29.2@-8.769,-45.847 ccw(c-8.769,-39.387) C33.2@-4.201,-43.955 ; D7.2@-7.693,-69.475 ccw(c-6.787,-68.569) -6.787,-69.85 ; D7.2@-7.671,-69.861 D7.2@-7.671,-69.85 ; D7.2@-7.671,-69.632 D7.2@-7.671,-69.85 ; v1(-6.782,-50.582) -6.782,-50.886 -6.807,-50.861 -6.807,-53.162 -6.579,-53.391 ; -6.355,-45.847 ccw(c-6.355,-41.802) C33.2@-3.494,-44.662 ; -4.972,-45.816 ccw(c-6.338,-44.45) C33.2@-4.406,-44.45 ; C33.2@-4.731,-45.574 cw(c-3.706,-46.599) C33.2@-3.706,-45.15 ; U7.5@-4.594,-49.708 -4.594,-53.387 -4.597,-53.391 ; -4.064,-41.3 -4.064,-40.953 U4.1@-2.041,-38.929 ; -3.173,-40.061 cw(c-1.978,-41.256) U4.1@-1.978,-39.566 ; -2.679,-39.568 ccw(c-3.487,-38.76) U4.1@-2.345,-38.76 ; -1.118,-46.66 -1.194,-46.736 U7.3@-1.194,-49.708 -1.194,-53.391 ; C28.1@5.232,-51.445 3.287,-53.391 ; v1(6.34,-55.905) 3.825,-53.391 3.287,-53.391 ; R37.1@10.922,-67.752 10.922,-69.85 ; 12.663,-69.024 ccw(c11.95,-68.311) D2.2@12.958,-68.311 ; D2.2@13.208,-68.478 11.836,-69.85 10.922,-69.85 ; D2.2@13.31,-68.161 ccw(c13.336,-65.863) 14.961,-67.488 ; D2.2@13.664,-68.353 14.096,-68.353 14.961,-67.488 ; v1@30.226,-41.427 32.741,-43.942 ; Battery1.2@30.328,-54.762 28.299,-52.733 22.969,-52.733 ccw(c22.969,-55.273) 21.173,-53.477 15.705,-58.946 ccw(c17.501,-60.742) 14.961,-60.742 14.961,-67.488 ; 32.8,-44.001 1_drivermotor3.8@38.015,-44.001 ; C36.1@60.032,-18.096 v1@61.722,-19.787 ; D7.2@-7.671,-69.85 10.922,-69.85 ; -6.579,-53.391 -4.597,-53.391 ; -4.597,-53.391 -1.194,-53.391 ; -1.194,-53.391 3.287,-53.391
  Top Layer w1.2: C33.2@-4.064,-44.399 -4.064,-41.453 ; -4.064,-42.138 ccw(c-1.395,-42.138) C33.2@-3.282,-44.026
  Top Layer w1.5: -42.597,43.213 POWER_SP1.4@-39.358,40.885 ; POWER_SP1.4@-39.284,40.989 POWER_SP1.3@-37.17,39.58 ; FB1.2@-7.01,-41.3 -4.064,-41.3 -3.886,-41.3 -3.81,-41.224 ; FB1.2@-6.757,-40.768 ccw(c-5.473,-39.484) -5.473,-41.3 ; -4.064,-41.453 -2.718,-41.453 -1.118,-43.053 -1.118,-46.66
  Top Layer w2: -65.481,4.597 -65.48,5.614 -65.473,9.855 -41.326,46.353 ; -65.476,4.597 -65.476,-23.424 -60.554,-28.346 ; -65.329,5.613 v1(-61.468,5.563) ; -63.432,11.346 1_drivermotor1.15@-59.615,8.76 ; 1_drivermotor2.8@-58.962,-25.899 -60.969,-27.906 -60.539,-28.332 -52.452,-36.348 ; -52.363,-36.437 -41.486,-47.219 ; -48.301,34.538 1_drivermotor1.8@-46.296,33.057 ; -42.621,43.18 -42.621,43.231 -42.597,43.213 ; -40.665,46.33 40.631,46.33 ; POWER_SP1.5@-38.579,37.467 POWER_SP1.3@-37.17,39.58 POWER_SP1.1@-35.761,41.693 ; 1_drivermotor2.15@-37.858,-43.59 -41.486,-47.219 ; kick1.2@-33.455,-49.756 -37.94,-49.756 cw(c-37.94,-47.216) -39.736,-49.012 -41.508,-47.24 -41.486,-47.219 ; -4.261,46.33 cw(c-4.261,44.683) IR2.0@-3.096,45.847 ; IR2.0@-3.379,45.847 cw(c-2.215,44.683) -2.215,46.33 ; 1.839,46.33 cw(c1.839,44.683) IR2.0@3.004,45.847 ; IR2.0@2.721,45.847 cw(c3.885,44.683) 3.885,46.33 ; 4.197,46.33 cw(c4.197,44.683) IR1.0@5.362,45.847 ; IR1.0@5.079,45.847 cw(c6.244,44.683) 6.244,46.33 ; 11.547,46.33 cw(c11.547,44.683) IR1.0@12.712,45.847 ; IR1.0@12.429,45.847 cw(c13.593,44.683) 13.593,46.33 ; Battery1.2@30.328,-54.762 34.214,-54.762 41.529,-47.447 ; 1_drivermotor3.8@38.015,-44.001 41.41,-47.396 41.453,-47.396 ; 40.69,46.27 49,34.2 49.064,34.107 ; 41.516,-47.485 50.868,-38.134 60.905,-28.097 ; 1_drivermotor4.15@44.492,30.906 48.752,33.893 ; 48.946,34.163 56.781,22.897 56.784,22.893 57.421,21.967 64.683,11.419 66.599,8.636 66.599,-19.787 ; 1_drivermotor3.15@55.787,-22.978 60.905,-28.097 ; 1_drivermotor4.8@61.716,9.419 64.111,11.025 ; v1@61.747,-19.837 66.599,-19.787 ; 60.905,-28.097 66.599,-22.403 66.599,-19.787
  Bottom Layer w0.6: C30.2@-29.845,-43.053 -29.845,-43.459 U8.5@-28.403,-44.902 ; C30.2@-29.639,-43.084 ccw(c-28.235,-43.084) -29.228,-44.077 ; U8.5@-28.403,-44.888 U8.5@-28.403,-44.902 ; -27.379,-45.976 cw(c-28.038,-46.634) v1@-27.107,-46.634 ; -27.257,-46.098 ccw(c-26.772,-45.613) v1@-26.772,-46.299 ; v1@-26.746,-46.609 -28.403,-44.952 U8.5@-28.403,-44.902
  Bottom Layer w0.635: v1@23.237,-42.984 U6.5@24.561,-41.66 ; v1@23.567,-42.781 23.567,-43.233 23.622,-43.179 v1@23.622,-43.028 ; v1@23.609,-43.231 cw(c25.103,-43.231) U6.5@24.047,-42.174 ; C25.2@28.97,-42.584 28.97,-42.559 C26.1@30.215,-41.314 ; C25.2@29.041,-42.181 ccw(c29.041,-41.44) 29.565,-41.964 ; C25.2@29.373,-42.514 cw(c30.237,-42.514) 29.626,-41.903 ; C25.2@29.436,-42.093 cw(c30.277,-42.934) C26.1@30.277,-41.745 ; C26.1@29.811,-41.385 cw(c29.009,-41.385) 29.576,-41.953 cw(c30.144,-42.52) C26.1@30.144,-41.718
  Bottom Layer w1: v1(-49.428,-33.452) -46.457,-30.48 v1(-32.995,-30.48) ; C32.1@-31.457,-41.566 -29.969,-43.053 C30.2@-29.845,-43.053 ; -23.33,-39.941 -21.093,-37.705 C18.1@-21.017,-37.705 ; C17.1@-22.262,-36.46 C18.1@-21.017,-37.705 ; C18.1@-20.865,-37.705 C18.1@-21.017,-37.705 ; -20.069,-38.653 ccw(c-19.389,-37.972) C16.1@-19.389,-38.935 ; C16.1@-19.202,-39.141 -19.581,-39.141 C18.1@-21.017,-37.705 ; U7.5@-4.594,-49.708 -4.594,-48.028 -3.759,-47.193 -1.93,-47.193 -1.118,-48.006 U7.3@-1.118,-49.632 ; C20.1@-2.576,-33.894 C21.1@-2.576,-32.207 ; C19.1@-2.55,-38.445 C20.1@-2.55,-34.036 ; -2.55,-37.613 ccw(c-1.062,-37.613) C19.1@-2.114,-38.665 ; -2.55,-37.529 ccw(c-1.001,-37.529) C19.1@-2.097,-38.624 ; -2.429,-38.048 cw(c-3.203,-38.494) C19.1@-2.34,-38.725 ; C19.1@-2.203,-38.83 -2.203,-39.86 -0.508,-41.554 3.454,-41.554 4.87,-40.139 D6.1@6.248,-40.139 ; C19.1@-2.075,-38.76 ccw(c0.888,-38.76) -1.207,-40.855 ; C19.1@-2.053,-38.93 ccw(c0.553,-38.93) -1.289,-40.773 ; C23.1@18.834,-37.808 17.501,-39.141 17.501,-40.437 v1(18.847,-41.783) C22.1@18.898,-41.834 ; C15_drivermotor4.1@33.175,26.638 41.529,32.207 43.967,31.902 44.471,30.895 44.501,30.836 1_drivermotor4.15@44.552,30.836 ; 41.794,32.174 cw(c41.327,28.445) 1_drivermotor4.15@44.294,30.752 ; 44.189,31.875 cw(c44.022,30.541) 1_drivermotor4.15@45.084,31.366 ; C15_drivermotor3.1@48.221,-11.391 56.179,-19.349 cw(c54.879,-20.65) 56.718,-20.65 56.718,-21.349 cw(c55.461,-21.349) 56.35,-22.238
  other v1: -26.772,-46.634 23.292,-43.231 -31.471,-41.58 30.277,-41.427 -22.377,-38.837 -2.21,-38.76 61.697,-19.812
  other v3: -6.934,-40.945
BUSY: U9.57
BUZ: R15.1 U1.40 | length 37.4
  Top Layer w0.305: -17.577,22.758 -17.577,22.2 -11.627,16.25 U1.40@-9.225,16.25 ; U1.40@-9.911,16.163 ccw(c-10.121,15.954) -10.121,16.25 ccw(c-10.121,16.546) U1.40@-9.911,16.336
  Top Layer w0.508: v1@-28.626,31.445 -24.435,35.636 -20.371,35.636 -17.577,32.842 -17.577,22.657 ; v1@-28.6,31.852 ccw(c-28.6,32.771) -27.95,32.121 ccw(c-27.3,31.471) v1@-28.219,31.471
  other v1: -28.6,31.471
CCLK: U9.72 U11.3 | length 43.7
  Top Layer w0.254: v2@-18.009,-27.559 -17.906,-27.661 U11.3@-16.337,-27.661 ; v2@-17.899,-27.449 ccw(c-17.388,-26.938) -17.388,-27.661 ; v2@-17.719,-27.797 cw(c-17.391,-28.126) -17.391,-27.661 ; v2@-17.719,-27.27 ccw(c-16.775,-26.325) U11.3@-16.775,-27.661 ; v2@-11.811,3.175 -11.481,3.175 -10.456,2.15 ccw(c-10.109,2.497) -10.109,2.007 -9.842,2.007 U9.72@-9.842,1.711 ; v2@-11.709,3.107 cw(c-11.709,2.39) -11.203,2.897 ; v2@-11.336,3.48 ccw(c-10.252,3.48) -11.019,2.713
  Bottom Layer w0.508: v2@-18.157,-27.36 ccw(c-18.577,-26.94) -17.983,-26.94 ccw(c-17.389,-26.94) v2@-17.809,-27.36 ; v2@-17.882,-27.432 -17.882,-27.356 -17.983,-27.254 -17.983,-1.778 -12.675,3.531 -11.887,3.531 -11.709,3.353 v2(-11.709,3.48) ; -12.426,3.531 cw(c-12.426,2.763) v2@-11.883,3.306
  other v2: -17.983,-27.534
CE: U1.29 U2.3 | length 9.9
  Top Layer w0.381: U2.3@-6.731,31.293 -6.731,31.217 -5.207,29.693 -5.207,23.532 U1.29@-5.175,23.5 ; U2.3@-6.706,30.533 cw(c-6.706,28.942) -5.581,30.067 ; -5.207,24.381 ccw(c-4.893,24.381) U1.29@-5.115,24.159
CHG_LIMIT: madarshoot1.5 U1.22 | length 52.3
  Top Layer w0.305: U1.22@0.339,24.186 ccw(c0.129,24.396) 0.425,24.396 ccw(c0.721,24.396) U1.22@0.512,24.186 ; U1.22@0.425,23.5 0.425,24.835 3.099,27.508
  Top Layer w0.4: 3.099,27.508 14.453,27.508 15.646,28.702 15.646,32.472 cw(c16.6,32.472) 15.925,33.146 ; 15.926,33.147 17.907,35.128 cw(c18.459,34.576) 18.459,35.357 36.139,35.357 ccw(c36.139,36.224) 36.523,35.446 ccw(c36.139,36.224) 36.753,35.611 v1(41.148,38.76) ; v1@40.719,38.831 cw(c39.683,39.002) 40.294,38.149 cw(c40.906,37.295) v1@41.077,38.331
  Bottom Layer w0.4: v1(41.148,38.76) madarshoot1.5@41.346,38.501
CLK: OSC-FPGA1.3 U9.127 | length 24.3
  Top Layer w0.254: v4@-1.26,-20.813 ccw(c-2.268,-19.804) U9.127@-0.842,-19.804 ; v4@-1.08,-20.992 ccw(c-1.655,-20.418) -0.842,-20.418 ; v4@-1.067,-21.184 v4(-1.067,-21.006) v4@-0.838,-20.777 ; v4@-1.041,-21.031 v4@-0.842,-20.832 ; v4@-0.842,-20.777 U9.127@-0.842,-19.339
  Bottom Layer w0.508: OSC-FPGA1.3@-15.442,-15.308 cw(c-16.544,-16.41) -14.985,-16.41 cw(c-13.425,-16.41) OSC-FPGA1.3@-14.528,-15.308 ; OSC-FPGA1.3@-14.985,-14.851 -14.985,-17.197 -11.176,-21.006 v4(-1.067,-21.006) ; v4@-1.067,-21.057 v4(-1.067,-21.006) ; v4@-1.041,-21.006 v4(-1.067,-21.006)
CLK_PAR: U1.63 U9.46 | length 7.3
  Top Layer w0.203: U9.46@3.158,1.711 3.158,5.114 3.607,5.563 U1.63@3.607,8.179 ; U1.63@3.503,7.477 cw(c3.251,7.225) 3.607,7.225 ; 3.607,7.137 cw(c4.088,7.137) U1.63@3.748,7.477
CSN: U1.30 U2.4 | length 6.2
  Top Layer w0.305: U2.4@-6.756,28.753 U2.4@-6.706,28.702 ; -5.975,25.293 -5.969,25.298
  Top Layer w0.381: U1.30@-5.975,23.5 -5.975,25.293
  Top Layer w0.432: U2.4@-6.706,28.702 -5.975,27.971 ; U2.4@-6.532,28.06 cw(c-6.314,27.632) -5.975,27.971 ; -5.975,25.293 -5.975,27.971
CUR_KICK: R6.2 U8.7 | length 15.4
  Top Layer w0.6: R6.2@-25.932,-38.683 -25.932,-39.219 v1@-23.431,-41.719 ; R6.2@-25.512,-38.754 ccw(c-23.373,-38.754) -24.885,-40.266 ; -24.034,-41.117 cw(c-24.649,-41.732) v1@-23.779,-41.732 ; -23.973,-41.178 ccw(c-23.444,-40.65) v1@-23.444,-41.397
  Bottom Layer w0.6: U8.7@-26.746,-42.977 -25.349,-44.374 -23.749,-44.374 -22.555,-43.18 -22.555,-42.621 v1(-23.444,-41.732) ; v1@-23.444,-42.067 cw(c-23.444,-42.876) -22.872,-42.304 cw(c-22.3,-41.732) v1@-23.109,-41.732